# Altium PCB Microcontroller circuit.PcbDoc
Units mm, origin at the board's own origin, x right, y up, seen from the top; angles counter-clockwise.
Board outline 76 x 53 mm, 2 copper layers (Top Layer, Bottom Layer); 31 components, 30 nets, 100 pads, 0 vias.
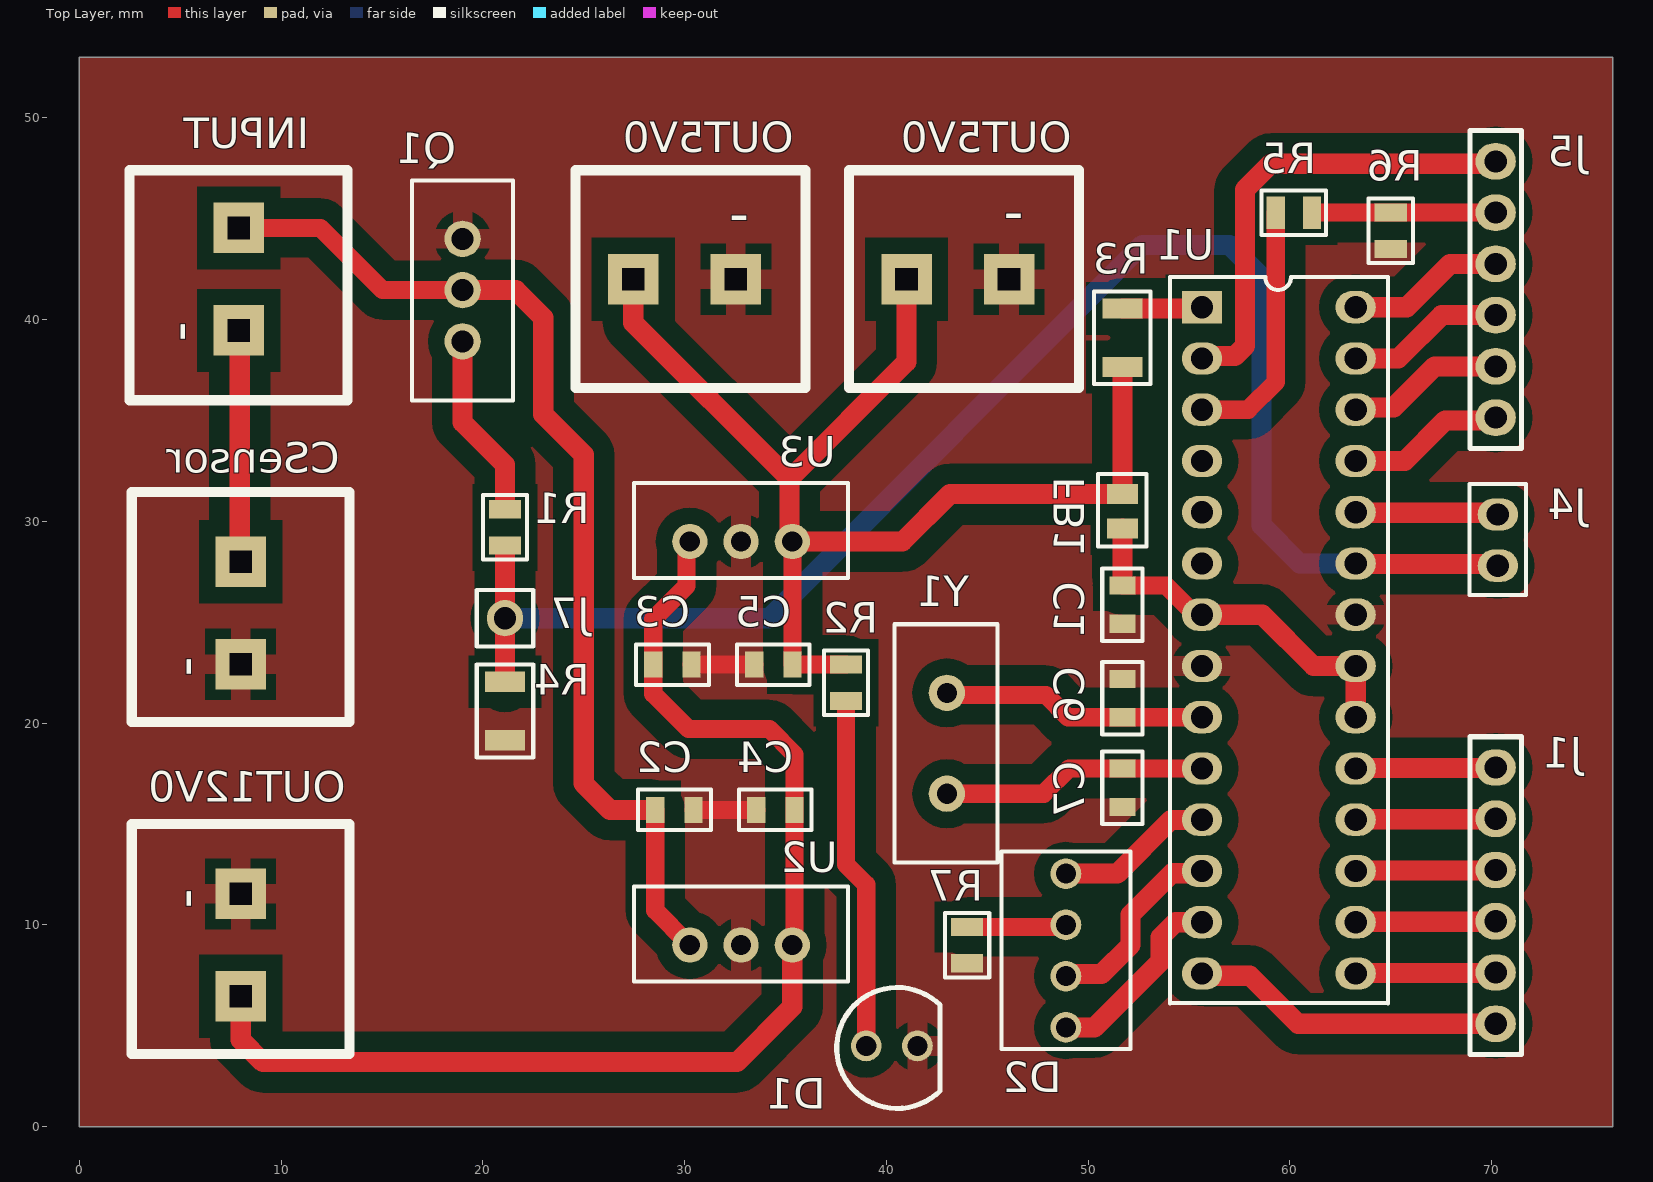
[diagram p0: Top Layer view]
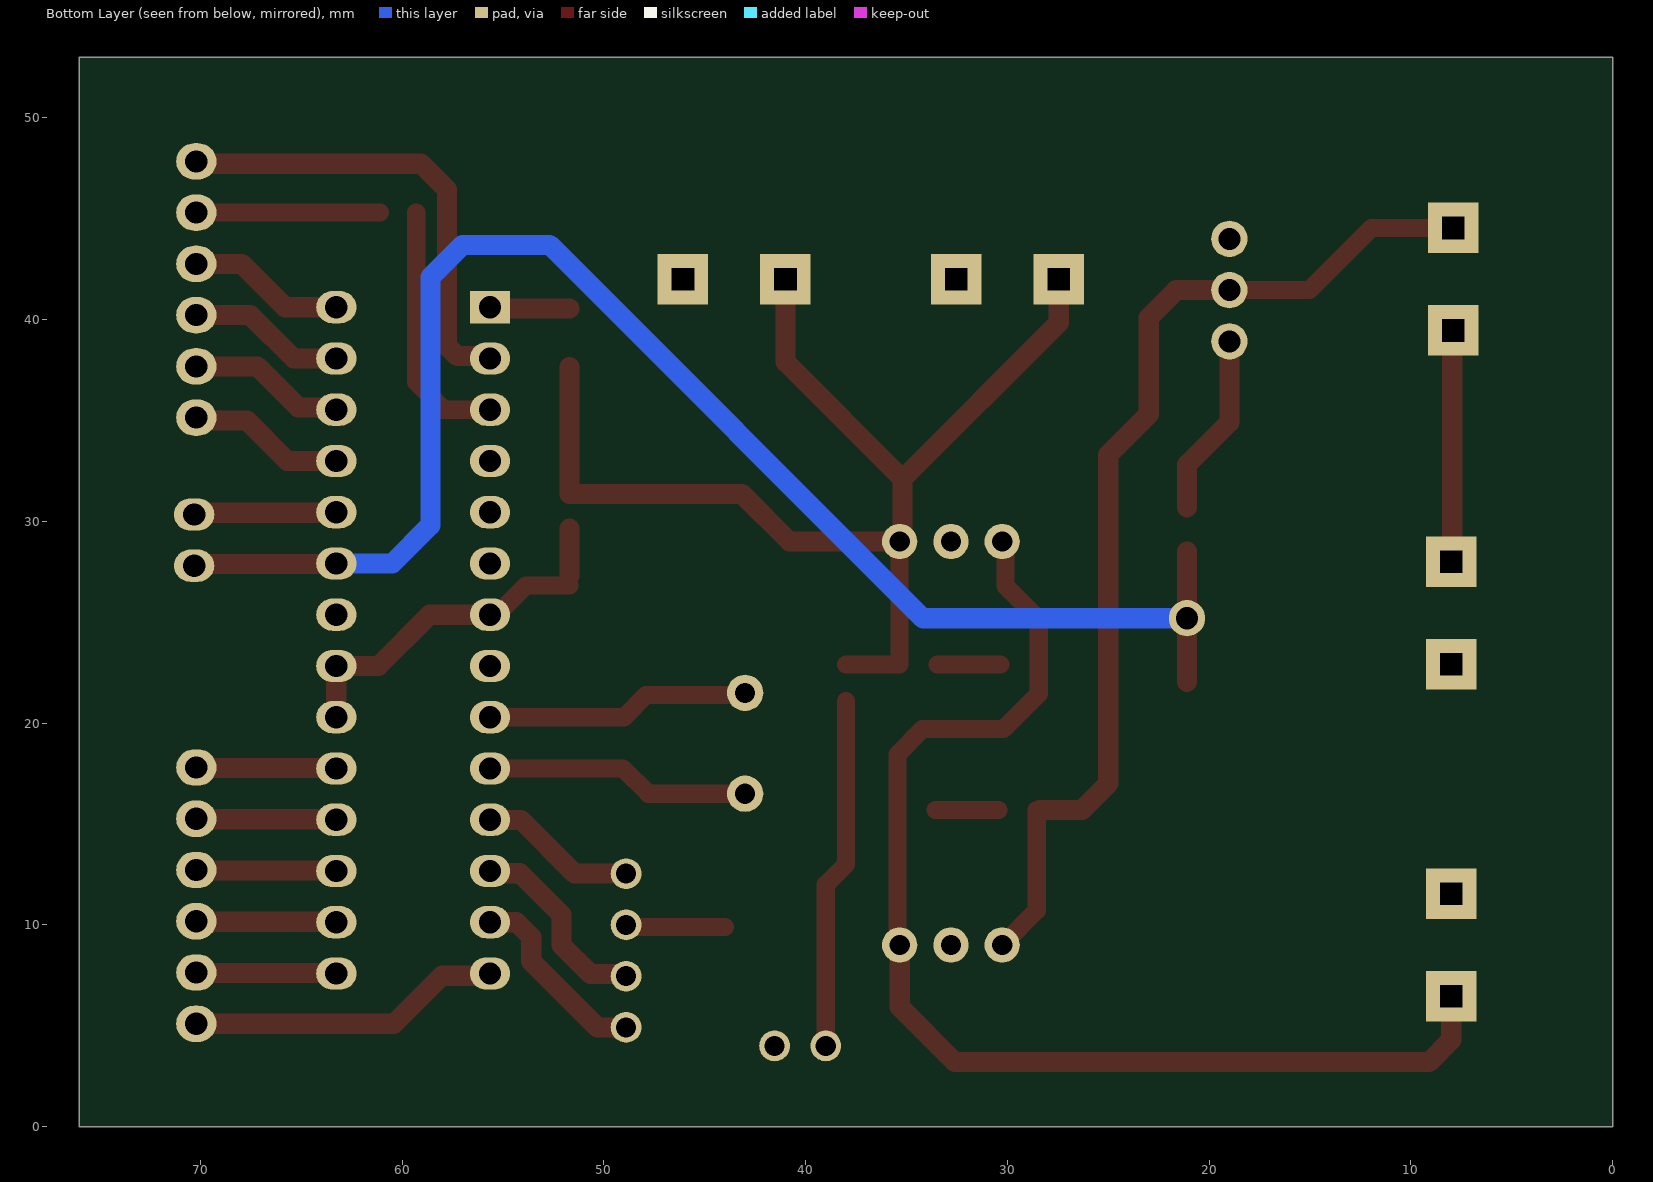
[diagram p1: Bottom Layer view, seen from below]
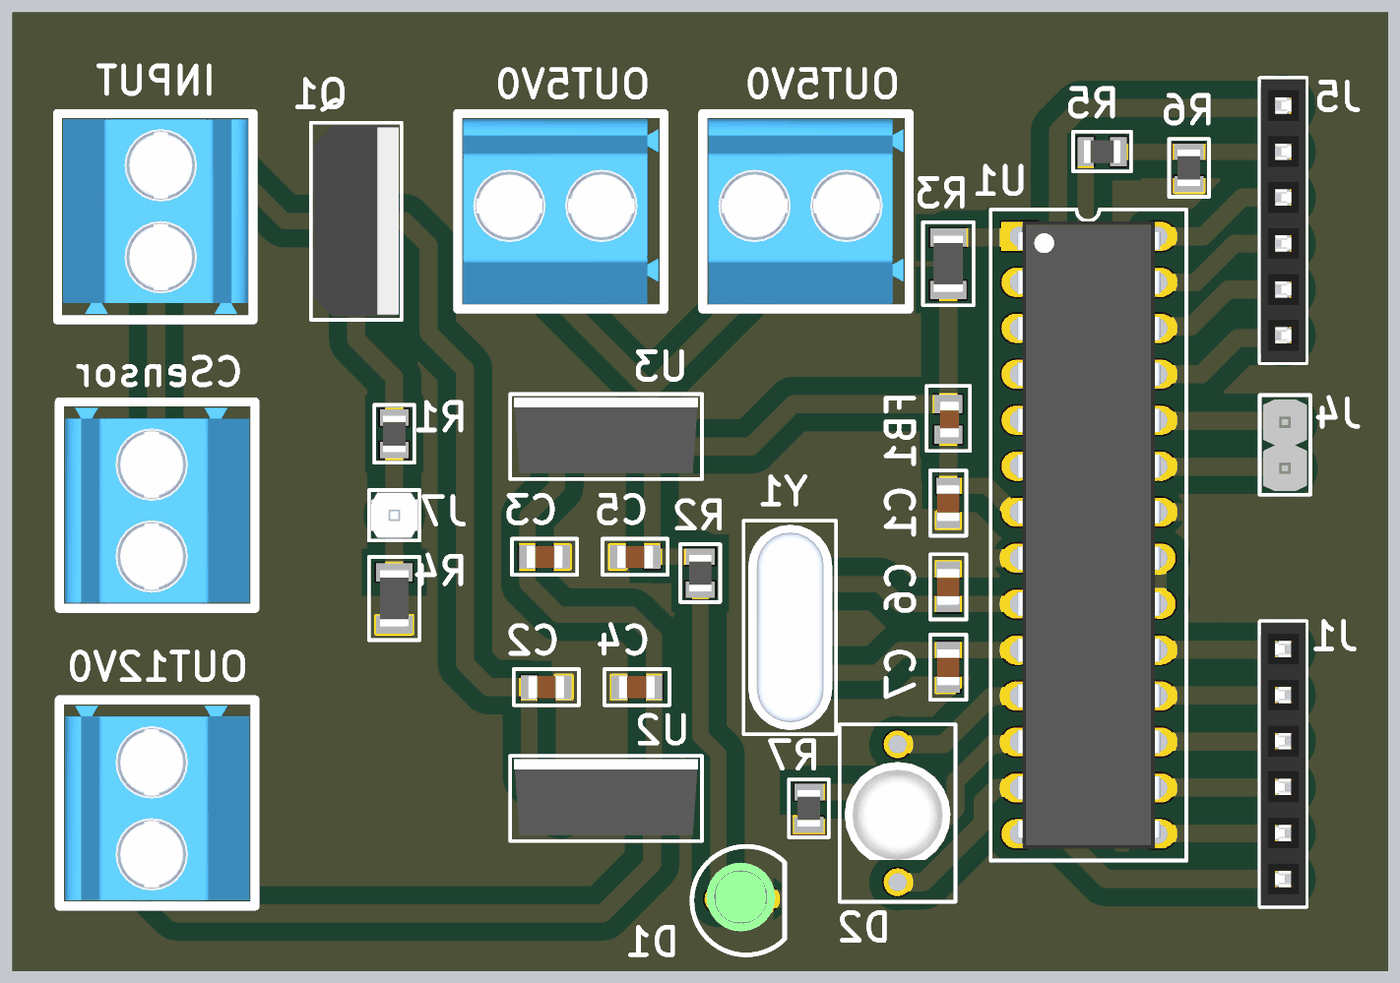
[diagram p2: 3D render of the assembled board from above, using the file's embedded part models]

## Layer stack, top to bottom
Top Solder: solder mask 0.0102, Solder Resist, Dk 3.5
Top Layer: signal copper 0.0356
Dielectric 1: dielectric 0.32, FR-4, Dk 4.8
Bottom Layer: signal copper 0.0356
Bottom Solder: solder mask 0.0102, Solder Resist, Dk 3.5

## Board outline
0,0 76,0 76,53 0,53

## Design rules (kind name [scope] priority, off if disabled: settings)
Clearance [All] p1: gap=0.5 ignorepadtopadclearanceinfootprint=FALSE except(0.8: SMDPad-Fill SMDPad-Poly SMDPad-Region THPad-Fill THPad-Poly THPad-Region; 1: Arc-Fill Arc-Poly Arc-Region Track-Fill Track-Poly Track-Region Via-Fill Via-Poly Via-Region Fill-Fill Fill-Poly Fill-Region Poly-Poly Poly-Region Region-Region)
PlaneClearance [All] p1: clearance=1.5
PolygonConnect [All] p1: thpad.connectstyle=Relief thpad.reliefconductorwidth=1 thpad.reliefentries=4 thpad.polygonreliefangle="90 Angle" thpad.airgapwidth=0.5 smdpad.connectstyle=Direct smdpad.reliefconductorwidth=1 smdpad.reliefentries=4 smdpad.polygonreliefangle="90 Angle" smdpad.airgapwidth=0.5 via.connectstyle=Relief via.reliefconductorwidth=1 via.reliefentries=4 via.polygonreliefangle="90 Angle" via.airgapwidth=0.5
RoutingVias [All] p1: holewidth=0.711 width=1.27 viastyle="Through Hole" minholewidth=0.711 minwidth=1.27 maxholewidth=0.711 maxwidth=1.27
SilkToSilkClearance [All] p1: silktosilkclearance=0.1
SilkToSolderMaskClearance [IsPad] p1: minsilkscreentomaskgap=0.05 clearancetoexposedcopper=TRUE
SolderMaskExpansion [All] p1: expansion=0.102
Width [All] p1: maxlimit=2 minlimit=0.6 preferedwidth=0.8 minimp=50.000000 maximp=50.000000 favimp=50.000000
27 further rules are at their usual default settings.

## Classes and differential pairs
component class "Microcontroller circuit": C1 C2 C3 C4 C5 C6 C7 CSensor D2 FB1 INPUT J1 J4 J5 J7 OUT5V0 OUT12V0 Q1 R1 R2 R4 R6 U1 U2 U3 Y1

## Components (designator, comment, footprint, x,y, rotation, side; value= is the part's Value field where it differs from the comment)
C1 "0.1uF" C0805 51.7,25.871 r90 top
C2 "0.22uF" C0805 29.5,15.7 r0 top
C3 "0.1uF" C0805 29.4,22.9 r180 top
C4 "0.22uF" C0805 34.5,15.7 r180 top
C5 "0.1uF" C0805 34.4,22.9 r0 top
C6 "22pF" C0805 51.7,21.24 r270 top
C7 "22pF" C0805 51.7,16.8 r90 top
CSensor "102-6179-ND" "Terminal block" 8,25.46 r0 top (schematic designator J8)
D1 "RedLED" THT_LED 41.54,4 r180 top
D2 "WP154A4SUREQBFZGC" "RGB LED" 48.9,8.73 r270 top
FB1 "BKP2125HS101-T" FB0805 51.7,30.5 r90 top
INPUT "102-6179-ND" "Terminal block" 7.9,42 r180 top (schematic designator J3)
J1 "M20-7820646" "HDR 1x6F" 70.2,17.8 r0 top
J4 "68000-202HLF" "HDR 1x2M" 70.303,30.34 r0 top
J5 "M20-7820646" "HDR 1x6F" 70.2,35.14 r180 top
J7 "PH1-01-UA" "HDR 1x1M" 21.1,25.2 r0 top
OUT5V0 "102-6179-ND" "Terminal block" 43.54,42 r270 top (schematic designator J6)
OUT5V0 "102-6179-ND" "Terminal block" 30,42 r270 top (schematic designator J2)
OUT12V0 "102-6179-ND" "Terminal block" 8,9 r0 top (schematic designator J9)
Q1 "IRF9530NPBF" IRF9530NPBF 19,44 r270 top
R1 "30kΩ" R0805 21.1,29.7 r90 top
R2 "330Ω" R0805 38,22 r90 top
R3 "10kΩ" R1206 51.7,39.1 r270 top
R4 "10kΩ" R1206 21.1,20.6 r90 top
R5 "220Ω" R0805 60.2,45.3 r0 top
R6 "470Ω" R0805 65,44.4 r270 top
R7 "330Ω" R0805 44,9 r90 top
U1 "ATMEGA8A-PU" ATmega8A 59.451,24.102 r0 top
U2 "REG 7812" "REG 78xx" 32.8,9 r0 top
U3 "REG 7805" "REG 78xx" 32.8,29 r0 top
Y1 "ECS-040-20-4X-DU" Crystal 43,19 r90 top

## Footprints (in the part's own frame and the unit in brackets; to place one, negate y for a bottom-side part, rotate by r counter-clockwise, add the part's x,y. Pads: shape width x height; smd on the part's side, far side on the other; paste and mask are expansions set on the pad)
ATmega8A [mm] "IC MCU 8BIT 8KB FLASH 28DIP"
  rect 2x1.6 hole 1.1: 1(-3.81,16.51)
  oval 2x1.6 hole 1.1: 2(-3.81,13.97) 3(-3.81,11.43) 4(-3.81,8.89) 5(-3.81,6.35) 6(-3.81,3.81) 7(-3.81,1.27) 8(-3.81,-1.27) 9(-3.81,-3.81) 10(-3.81,-6.35) 11(-3.81,-8.89) 12(-3.81,-11.43) 13(-3.81,-13.97) 14(-3.81,-16.51) 15(3.81,-16.51) 16(3.81,-13.97) 17(3.81,-11.43) 18(3.81,-8.89) 19(3.81,-6.35) 20(3.81,-3.81) 21(3.81,-1.27) 22(3.81,1.27) 23(3.81,3.81) 24(3.81,6.35) 25(3.81,8.89) 26(3.81,11.43) 27(3.81,13.97) 28(3.81,16.51)
  silkscreen extent -5.4,-18 5.4,18, body extent -3.95,-17.34 3.95,17.34, height 4.57
C0805 [mm] "0.1uF"
  rect 0.9x1.3 smd: 1(-0.95,0) 2(0.95,0)
  silkscreen extent -1.8,-1 1.8,1, body extent -1,-0.62 1,0.63, height 1
Crystal [mm] "CRYSTAL 4.0000MHZ 20PF TH"
  round 1.8 hole 1: 1(-2.5,0) 2(2.5,0)
  silkscreen extent -5.9,-2.5 5.9,2.6, body extent -5.67,-2.3 5.67,2.35, height 4
FB0805 [mm]
  rect 1x1.55 smd: 1(-0.85,0) 2(0.85,0)
  silkscreen extent -1.75,-1.2 1.85,1.2, body extent -1,-0.6 1,0.45, height 1.22
"HDR 1x1M" [mm]
  round 1.8 hole 1.1: 1(0,0)
  silkscreen extent -1.4,-1.4 1.4,1.4, body extent -1.27,-1.25 1.28,1.25, height 7.25
"HDR 1x2M" [mm] "CONN HEADER VERT 2POS 2.54MM"
  oval 2x1.6 hole 1.1: 1(0,0) 2(0,-2.54)
  silkscreen extent -1.4,-4 1.4,1.5, body extent -1.21,-3.81 1.21,1.27, height 8.18
"HDR 1x6F" [mm] "6 Position Receptacle Connector 0.100\" (2.54mm) Through Hole Tin"
  oval 2x1.8 hole 1.1: 1(0,0) 2(0,-2.54) 3(0,-5.08) 4(0,-7.62) 5(0,-10.16) 6(0,-12.7)
  silkscreen extent -1.27,-14.22 1.27,1.52, body extent -1.25,-14.17 1.25,1.47, height 8.51
IRF9530NPBF [mm] "MOSFET P-CH 100V 14A TO220AB"
  round 1.8 hole 1.1: 1(0,0) 2(2.54,0) 3(5.08,0)
  silkscreen extent -2.9,-2.5 8,2.5, body extent -2.73,-2.35 7.81,2.35, height 15.75
R0805 [mm]
  rect 0.9x1.6 smd: 1(-0.9,0) 2(0.9,0)
  silkscreen extent -1.6,-1.1 1.6,1.1, body extent -1,-0.62 1,0.63, height 0.6
R1206 [mm]
  rect 1x2 smd: 1(-1.45,0) 2(1.45,0)
  silkscreen extent -2.3,-1.4 2.3,1.4, body extent -1.55,-0.8 1.55,0.8, height 0.65
"REG 78xx" [mm]
  round 1.75 hole 1: 1(-2.54,0) 2(0,0) 3(2.54,0)
  silkscreen extent -5.3,-1.8 5.3,2.9, body extent -5.08,-1.48 5.08,2.71, height 22.86
"RGB LED" [mil]
  round 60 hole 39.37: 1(-150,0) 2(-50,0) 3(50,0) 4(150,0)
  silkscreen extent -193,-126 193,126, body extent -112,-115 102,115, height 459
"Terminal block" [mm] "102-6179-ND"
  rect 2.5x2.5 hole 1.1 square: 1(0,-2.54) 2(0,2.54)
  silkscreen extent -5.4,-5.4 5.4,6, body extent -5.1,-5.08 5.1,5.68, height 14.1
THT_LED [mil] "LED RED CLEAR T-1 T/H"
  round 60 hole 39.37: 1(0,0) 2(100,0)
  silkscreen extent -44,-114 157,122, body extent -24,-79 126,71, height 224

## Part data
C1 C3 C5: library part "0.1uF CAP", "CAP CER 0.1UF 50V X7R 0805", Manufacturer="TDK Corporation", MPN=C2012X7R1H104K085AA, SPN=445-7534-1-ND, Supplier=DigiKey
C2 C4: library part "0.22uF CAP", "CAP CER 0.22UF 25V X7R 0805", Manufacturer=YAGEO, MPN=CC0805KRX7R8BB224, SPN=311-1432-1-ND, Supplier=DigiKey
C6 C7: library part "22pF CAP", "CAP THIN FILM 22PF 50V 0805", Manufacturer="KYOCERA AVX", MPN=08055J220FBTTR, SPN=478-11911-1-ND, Supplier=DigiKey
CSensor INPUT OUT5V0 OUT5V0 OUT12V0: library part "Terminal block", "TERMINAL BLOCK, SCREW TYPE, 5.08", Manufacturer="CUI Devices", MPN=TB004-508-02BE, Parameter 1=102-6179-ND, Supplier=DigiKey
D1: library part WP132XIT, "LED RED CLEAR T-1 T/H", Manufacturer=Kingbright, MPN=WP132XIT, SPN=754-1710-ND, Supplier=DigiKey
D2: library part "RGB LED", "LED RGB CLEAR T-1 3/4 T/H", Manufacturer=Kingbright, MPN=WP154A4SUREQBFZGC, SPN=754-1615-ND, Supplier=DigiKey
FB1: library part "Ferrite Bead", "FERRITE BEAD 100 OHM 0805 1LN", Manufacturer="Taiyo Yuden", MPN=BKP2125HS101-T, SPN=587-1929-1-ND, Supplier=DigiKey
J1 J5: library part "HDR 1x6F", "CONN RCPT 6POS 0.1 TIN PCB", Manufacturer="Harwin Inc.", MPN=M20-7820646, SPN=952-1809-ND, Supplier=DigiKey
J4: library part "HDR 1x2M", "CONN HEADER VERT 2POS 2.54MM", Manufacturer="Amphenol ICC (FCI)", MPN=68000-202HLF, SPN=609-3502-ND, Supplier=DigiKey
J7: library part "HDR 1x1M", "CONN HEADER VERT 1POS 2.54MM", Manufacturer="Adam Tech", MPN=PH1-01-UA, SPN=2057-PH1-01-UA-ND, Supplier=DigiKey
Q1: "MOSFET P-CH 100V 14A TO220AB", Manufacturer="Infineon Technologies", MPN=IRF9530NPBF, SPN=IRF9530NPBF-ND, Supplier=DigiKey
R1 R2 R5 R6 R7: library part "330O RES", "RES 330 OHM 1% 1/8W 0805", Manufacturer=YAGEO, MPN=RC0805FR-07330RL, SPN=311-330CRCT-ND, Supplier=DigiKey
R3 R4: library part "10kO RES", "RES 10K OHM 1% 1/4W 1206", Manufacturer=YAGEO, MPN=RC1206FR-0710KL, SPN=311-10.0KFRCT-ND, Supplier=DigiKey
U1: library part ATmega8, "IC MCU 8BIT 8KB FLASH 28DIP", Manufacturer="Microchip Technology", ComponentLink1Description=Datasheet, ComponentLink1URL=https://ww1.microchip.com/downloads/en/DeviceDoc/ATmega8A-Data-Sheet-DS40001974B.pdf, MPN=ATMEGA8A-PU, SPN=ATMEGA8A-PU-ND, Supplier=DigiKey
U2: library part LM7812CT/NOPB, "IC REG LINEAR 12V 1A TO220-3", Manufacturer="Texas Instruments", MPN=LM7812CT/NOPB, SPN=296-50628-ND, Supplier=DigiKey
U3: library part LM7805CT/NOPB, "IC REG LINEAR 5V 1A TO220-3", Manufacturer="Texas Instruments", ComponentLink1Description=Datasheet, ComponentLink1URL=https://www.ti.com/general/docs/suppproductinfo.tsp?distId=10&gotoUrl=https%3A%2F%2Fwww.ti.com%2Flit%2Fgpn%2Flm340, MPN=LM7805CT/NOPB, SPN=296-47192-ND, Supplier=DigiKey
Y1: library part "Crystal 4MHz", "CRYSTAL 4.0000MHZ 20PF TH", Manufacturer="ECS Inc.", MPN=ECS-040-20-4X-DU, SPN=XC1920-ND, Supplier=DigiKey

## Nets (pads, with @x,y where several pads share a name; then routed paths per layer and width w, separated by ;. In a path a pad name is that pad's centre, name@x,y a point inside that pad or via, vN(x,y) a via of type N, cw(c..) or ccw(c..) an arc to the next point about the centre after c; other vN are vias at no path point)
+5V0: C5.2 FB1.2 OUT5V0.1 R2.2 R3.2 U3.3 | length 61
  Top Layer w0.9: U3.3 35.35,28.99 C5.2 37.65,22.9 R2.2
  Top Layer w1: OUT5V0.1@27.46,42 27.46,39.84 35.2,32.1 ; OUT5V0.1@41,42 41,37.9 35.2,32.1 ; R3.2 FB1.2 43.15,31.35 40.8,29 U3.3 35.2,29.14 35.2,32.1
+12V0: C3.2 C4.1 OUT12V0.1 U2.3 U3.1 | length 60.2
  Top Layer w0.9: U3.1 30.097,28.837 30.097,26.797 28.45,25.15 C3.2 28.45,21.45 30.2,19.7 34.2,19.7 35.45,18.45 C4.1 35.45,9.11 U2.3
  Top Layer w1: OUT12V0.1 8,4.3 9.1,3.2 32.6,3.2 35.34,5.94 U2.3
Blue: D2.3 U1.12 | length 9.8
  Top Layer w1: D2.3 49,7.56 50.66,7.56 52.1,9 52.1,10.5 54.157,12.557 55.526,12.557 U1.12
CSensor: J4.1 U1.24 | length 7.1
  Top Layer w1: U1.24 63.287,30.426 70.217,30.426 J4.1
ESC: J1.3 U1.17 | length 7
  Top Layer w1: U1.17 63.285,12.696 70.176,12.696 J1.3
GND: C1.1 C2.2 C3.1 C4.2 C5.1 C6.1 C7.1 CSensor.1 D1.1 OUT5V0.2 OUT12V0.2 Q1.1 R4.1 R6.2 R7.1 U1.8 U1.22 U2.2 U3.2 | length 6.4
  Top Layer w0.9: C3.1 C5.1 ; C2.2 C4.2
  Top Layer w1: U1.22@63.146,25.487 U1.22
Green: D2.4 U1.13 | length 9.8
  Top Layer w1: D2.4 50.32,4.92 53.6,8.2 53.6,9.4 54.332,10.132 U1.13 U1.13@55.526,10.017
I/O1: J1.6 U1.14 | length 15.6
  Top Layer w1: U1.14 55.756,7.477 58.023,7.477 60.4,5.1 J1.6
I/O2: J5.4 U1.28 | length 7.9
  Top Layer w1: U1.28@63.281,40.632 U1.28 65.791,40.612 67.939,42.76 J5.4
I/O3: J5.1 U1.25 | length 7.8
  Top Layer w1: U1.25 65.692,32.992 67.7,35 70.06,35 J5.1
M1.1: J1.1 U1.19 | length 7
  Top Layer w1: U1.19 63.285,17.776 70.176,17.776 J1.1
M1.2: J1.2 U1.18 | length 7
  Top Layer w1: U1.18 63.285,15.236 70.176,15.236 J1.2
M1EN: J1.4 U1.16 | length 7
  Top Layer w1: U1.16 63.285,10.156 70.176,10.156 J1.4
M2.1: J5.3 U1.27 | length 7.9
  Top Layer w1: U1.27@63.333,38 U1.27 65.372,38.072 67.52,40.22 J5.3
M2.2: J5.2 U1.26 | length 7.8
  Top Layer w1: U1.26 63.376,35.647 65.147,35.647 67.18,37.68 J5.2
M2EN: J1.5 U1.15 | length 7
  Top Layer w1: U1.15 63.285,7.616 70.176,7.616 J1.5
NetC1_2: C1.2 FB1.1 U1.7 U1.20 U1.21 | length 18.1
  Top Layer w0.9: C1.2 53.849,26.821 55.298,25.372 U1.7
  Top Layer w1: 51.7,27.3 FB1.1 ; U1.7 58.628,25.372 61.168,22.832 U1.21 U1.20
NetC6_2: C6.2 U1.9 Y1.2 | length 13.1
  Top Layer w0.9: Y1.2 43.1,21.4 47.9,21.4 49.01,20.29 C6.2 51.9,20.29 51.902,20.292 U1.9
NetC7_2: C7.2 U1.10 Y1.1 | length 13.2
  Top Layer w0.9: Y1.1 47.8,16.5 49.05,17.75 C7.2 51.9,17.75 51.902,17.752 U1.10
NetD1_2: D1.2 R2.1 | length 17.5
  Top Layer w0.9: R2.1 38,13 39,12 D1.2
NetD2_2: D2.2 R7.2 | length 4.9
  Top Layer w0.9: R7.2 48.8,9.9 D2.2
NetJ3_2: CSensor.2 INPUT.2 | length 11.5
  Top Layer w1: INPUT.2 7.95,39.41 7.95,28.05 CSensor.2
NetJ5_5: J5.5 R5.2 R6.1 | length 9.1
  Top Layer w0.9: R5.2 64.65,45.3 R6.1 J5.5
NetQ1_3: Q1.3 R1.2 | length 9.1
  Top Layer w1: Q1.3 19,34.9 21.1,32.8 R1.2@21.1,30.7
NetR3_1: R3.1 U1.1 | length 4
  Top Layer w1: R3.1 55.579,40.55 U1.1
Red: D2.1 U1.11 | length 7.8
  Top Layer w1: D2.1 51.44,12.54 54.1,15.2 55.629,15.2 U1.11
Rx: J5.6 U1.2 | length 23.1
  Top Layer w1: U1.2 55.756,38.187 57.269,38.187 57.768,38.686 57.768,46.432 59.056,47.72 70.08,47.72 J5.6
Tx: R5.1 U1.3 | length 12.6
  Top Layer w0.9: U1.3 57.932,35.532 59.3,36.9 R5.1
VCC: C2.1 INPUT.1 Q1.2 U2.1 | length 52.2
  Top Layer w0.9: INPUT.1 11.96,44.54 15.04,41.46 Q1.2 ; C2.1 28.55,10.71 30.175,9.085 U2.1
  Top Layer w1: Q1.2 21.64,41.46 23,40.1 23,35.3 25,33.3 25,17 26.3,15.7 C2.1@28.4,15.7
VSensor: J4.2 J7.1 R1.1 R4.2 U1.23 | length 77.1
  Top Layer w1: R4.2 J7.1 R1.1@21.1,28.5 ; U1.23 63.287,27.886 70.217,27.886 J4.2
  Bottom Layer w1: J7.1 34.192,25.2 52.692,43.7 57,43.7 58.6,42.1 58.6,29.8 60.488,27.912 U1.23
pads on no net: U1.4 U1.5 U1.6

## Polygon pours and split planes (outlines as drawn)
GND on Top Layer "GND" (solid, remove dead copper, pour order 4): 0,0 76,0 76,53 0,53

## Silkscreen, mask and mechanical layers (free items; w line width, h text height)
Top Overlay:
  text "-" at 46.8,45.9 h2 r180
  text "-" at 33.2,45.8 h2 r180
  text "-" at 5.9,38.9 h2 r90
  text "-" at 6.2,22.3 h2 r90
  text "-" at 6.2,10.8 h2 r90